# Altium PCB Connector.PcbDoc
Units mm, origin at the board's own origin, x right, y up, seen from the top; angles counter-clockwise.
Board outline 20 x 8 mm, 2 copper layers (Top Layer, Bottom Layer), stack 1.58 mm thick; 3 components, 0 nets, 15 pads, 12 vias.
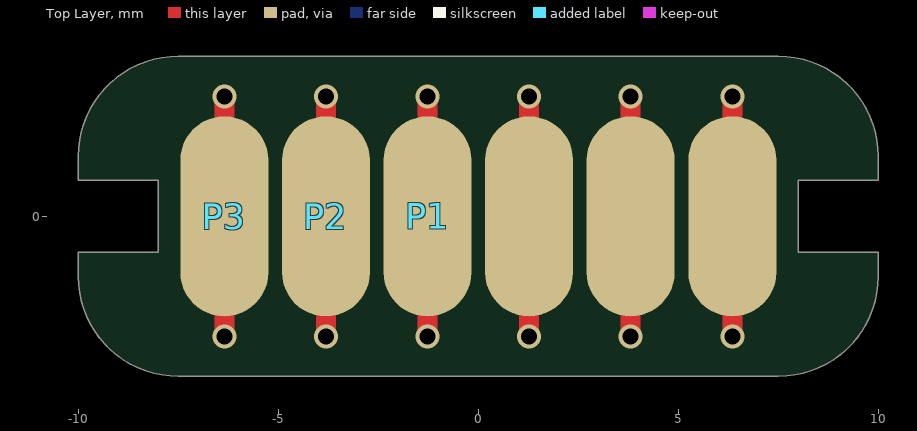
[diagram p0: Top Layer view]
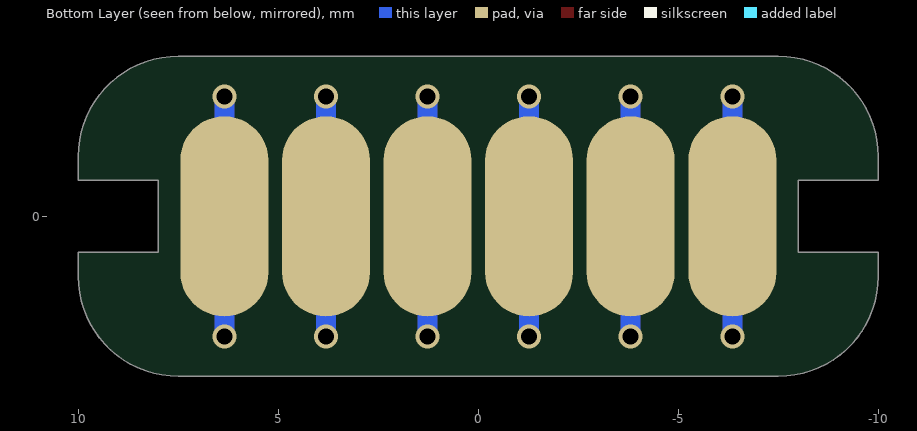
[diagram p1: Bottom Layer view, seen from below]

## Layer stack, top to bottom
Top Solder: solder mask 0.0102, Solder Resist, Dk 3.5
Top Layer: signal copper 0.0356
Dielectric 1: dielectric 1.5086, FR-4, Dk 4.8
Bottom Layer: signal copper 0.0356
Bottom Solder: solder mask 0.0102, Solder Resist, Dk 3.5

## Board outline
-10,-0.9 -8,-0.9 -8,0.9 -10,0.9 -10,1.5 cw(c-7.5,1.5) -7.5,4 7.5,4 cw(c7.5,1.5) 10,1.5 10,0.9 8,0.9 8,-0.9 10,-0.9 10,-1.5 cw(c7.5,-1.5) 7.5,-4 -7.5,-4 cw(c-7.5,-1.5) -10,-1.5

## Design rules (kind name [scope] priority, off if disabled: settings)
Clearance [All] p1: gap=0.254 ignorepadtopadclearanceinfootprint=FALSE
PolygonConnect [All] p1: connectstyle=Relief reliefconductorwidth=0.254 reliefentries=4 polygonreliefangle="90 Angle" airgapwidth=0.254
RoutingVias [All] p1: holewidth=0.711 width=1.27 viastyle="Through Hole" minholewidth=0.711 minwidth=1.27 maxholewidth=0.711 maxwidth=1.27
SolderMaskExpansion [All] p1: expansion=0.102 istentingtop=FALSE
Width [All] p1: maxlimit=0.254 minlimit=0.254 preferedwidth=0.254
30 further rules are at their usual default settings.

## Components (designator, comment, footprint, x,y, rotation, side; value= is the part's Value field where it differs from the comment)
P1 "Pogo" POGO -1.27,0 r0 top
P2 "Pogo" POGO -3.81,0 r0 top
P3 "Pogo" POGO -6.35,0 r0 top

## Footprints (in the part's own frame and the unit in brackets; to place one, negate y for a bottom-side part, rotate by r counter-clockwise, add the part's x,y. Pads: shape width x height; smd on the part's side, far side on the other; paste and mask are expansions set on the pad)
POGO [mm]
  round 2.2 smd: 1(0,0)
  body extent -1,-1 1,1, height 5

## Free pads (board coordinates)
  oval 2.2x5 smd paste-2539.97 mask+0: PAD(-6.35,0) PAD(-3.81,0) PAD(-1.27,0) PAD(1.27,0) PAD(3.81,0) PAD(6.35,0)
  oval 2.2x5 smd far side paste-2539.97 mask+0: PAD(-6.35,0) PAD(-3.81,0) PAD(-1.27,0) PAD(1.27,0) PAD(3.81,0) PAD(6.35,0)

## Via types
v1: diameter 0.6, hole 0.4, Top Layer to Bottom Layer, tented both sides, 12 vias

## Nets (pads, with @x,y where several pads share a name; then routed paths per layer and width w, separated by ;. In a path a pad name is that pad's centre, name@x,y a point inside that pad or via, vN(x,y) a via of type N, cw(c..) or ccw(c..) an arc to the next point about the centre after c; other vN are vias at no path point)
pads on no net: P1.1 P2.1 P3.1
copper on no net: | length 24
  Top Layer w0.5: v1(-6.35,-3) -6.35,-2 ; -6.35,2 v1(-6.35,3) ; v1(-3.81,-3) -3.81,-2 ; -3.81,2 v1(-3.81,3) ; v1(-1.27,-3) -1.27,-2 ; -1.27,2 v1(-1.27,3) ; v1(1.27,-3) 1.27,-2 ; 1.27,2 v1(1.27,3) ; v1(3.81,-3) 3.81,-2 ; 3.81,2 v1(3.81,3) ; v1(6.35,-3) 6.35,-2 ; 6.35,2 v1(6.35,3)
  Bottom Layer w0.5: v1(-6.35,-3) -6.35,-2 ; -6.35,2 v1(-6.35,3) ; v1(-3.81,-3) -3.81,-2 ; -3.81,2 v1(-3.81,3) ; v1(-1.27,-3) -1.27,-2 ; -1.27,2 v1(-1.27,3) ; v1(1.27,-3) 1.27,-2 ; 1.27,2 v1(1.27,3) ; v1(3.81,-3) 3.81,-2 ; 3.81,2 v1(3.81,3) ; v1(6.35,-3) 6.35,-2 ; 6.35,2 v1(6.35,3)

## Silkscreen, mask and mechanical layers (free items; w line width, h text height)
Mechanical 1:
  lines w0.2: -10,-1.5 ccw(c-7.5,-1.5) -7.5,-4 7.5,-4 ccw(c7.5,-1.5) 10,-1.5 10,-0.9 8,-0.9 8,0.9 10,0.9 10,1.5 ccw(c7.5,1.5) 7.5,4 -7.5,4 ccw(c-7.5,1.5) -10,1.5 -10,0.9 -8,0.9 -8,-0.9 -10,-0.9 -10,-1.5 ; 0,0 0,0